# Altium PCB PCB1.PcbDoc (part 1 of 3)
Units mil, origin at the board's own origin, x right, y up, seen from the top; angles counter-clockwise.
Board outline 2860 x 1380 mil, 4 copper layers (L1, L2, L3, L4), stack 61.583 mil thick; 101 components, 94 nets, 397 pads, 115 vias.
Unrouted connection lines stored in the file: 102.
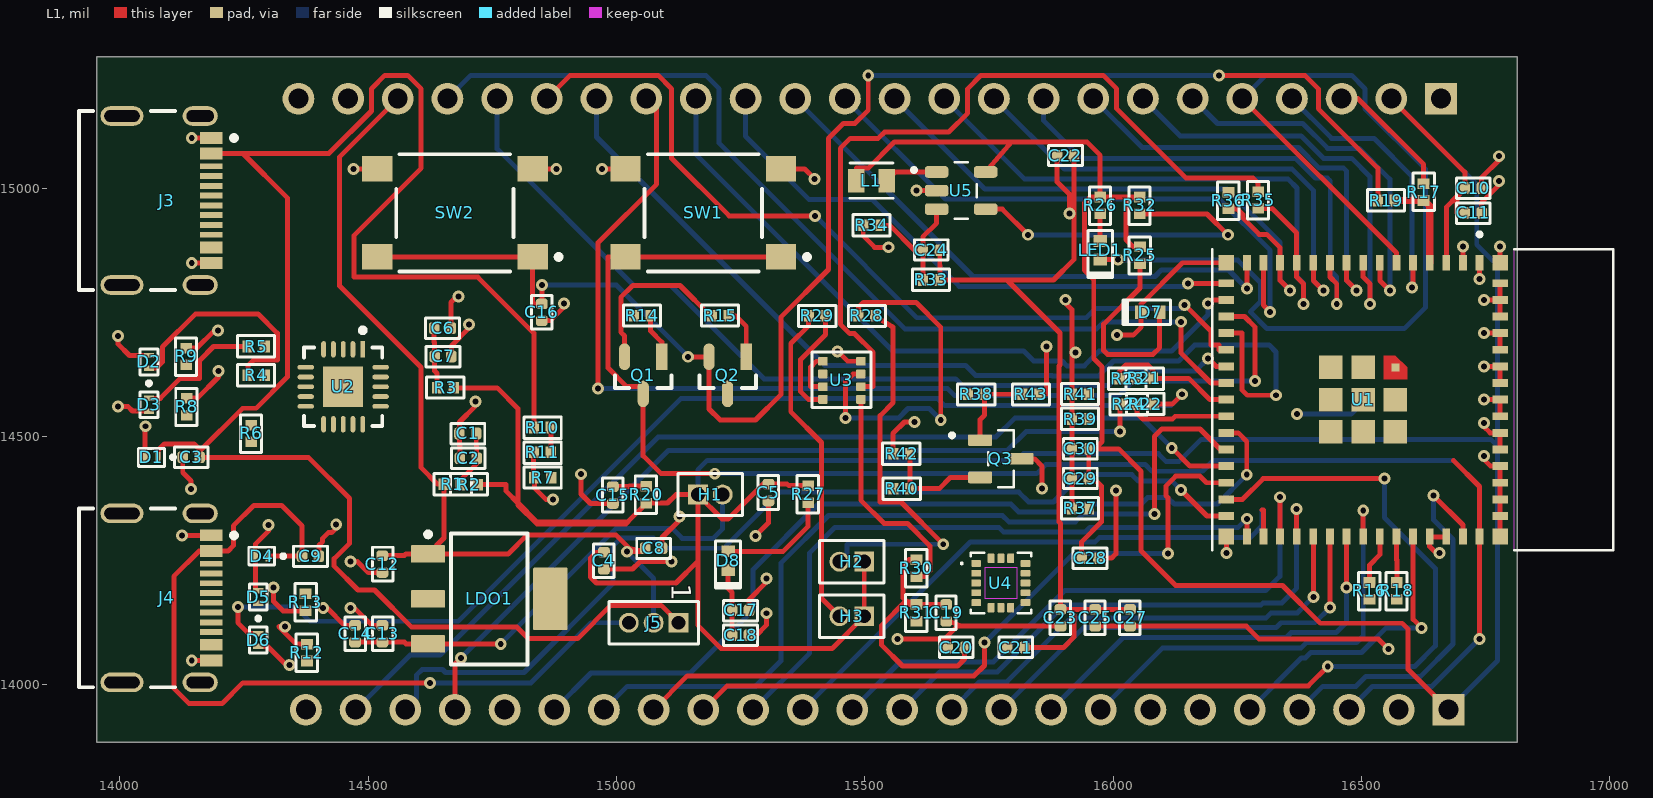
[diagram p0: L1 view]
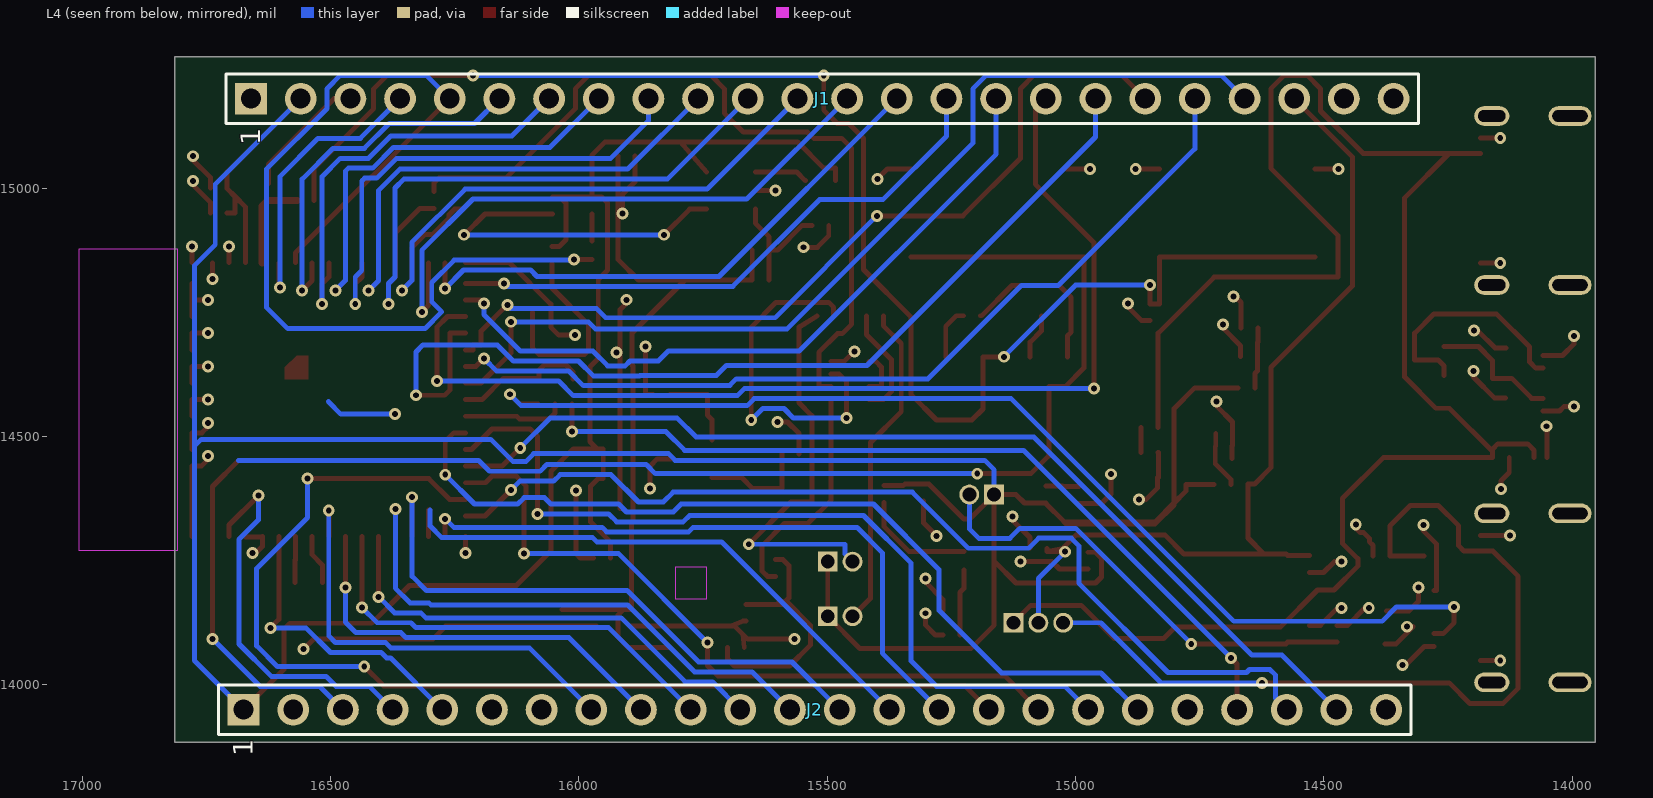
[diagram p1: L4 view, seen from below]
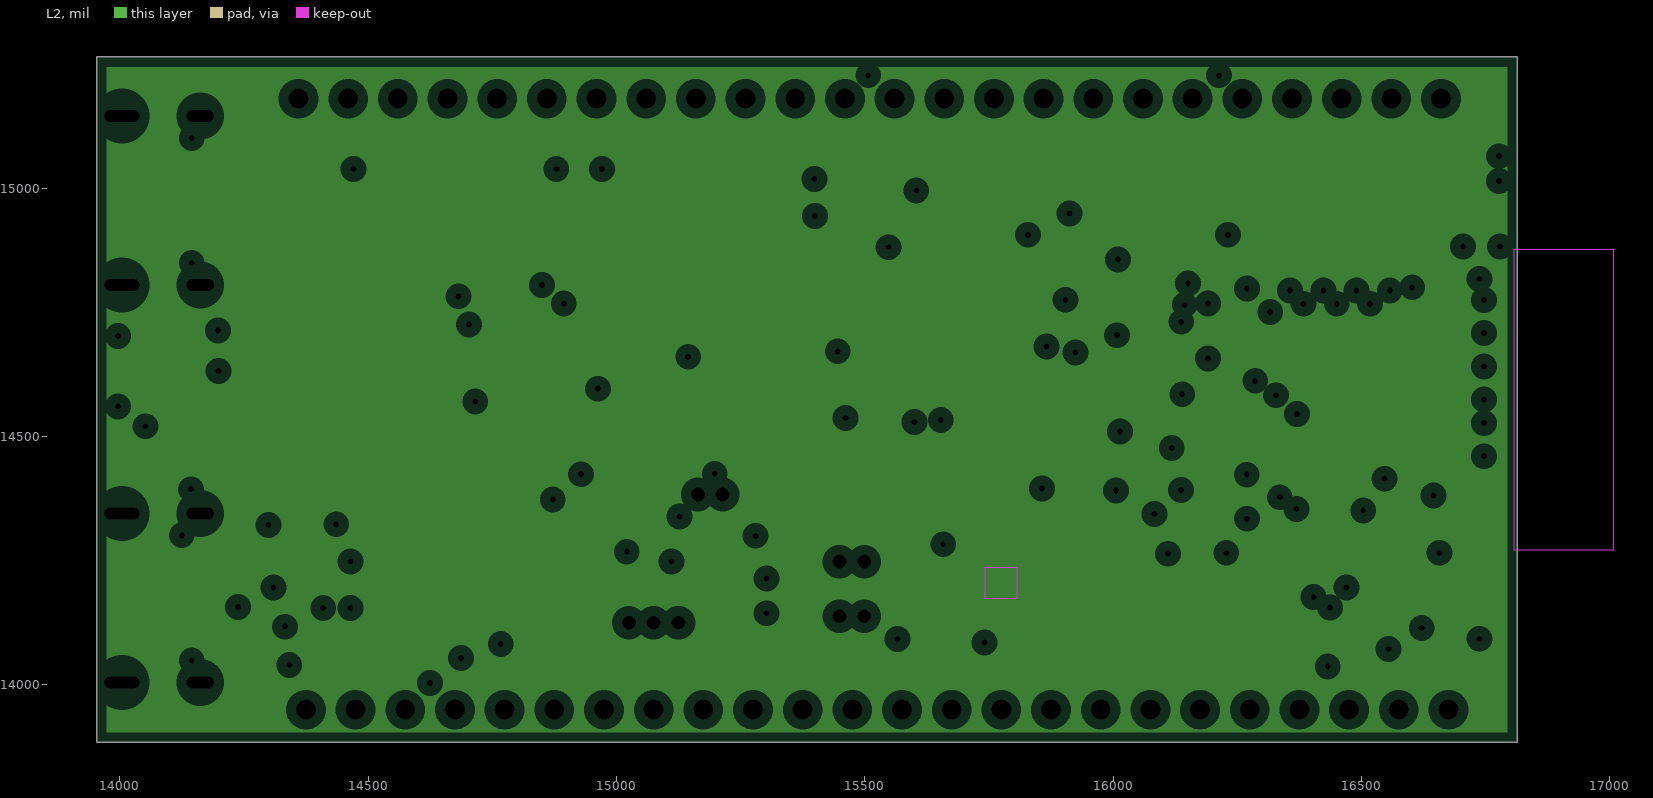
[diagram p2: L2, clearances drawn from the general rule]
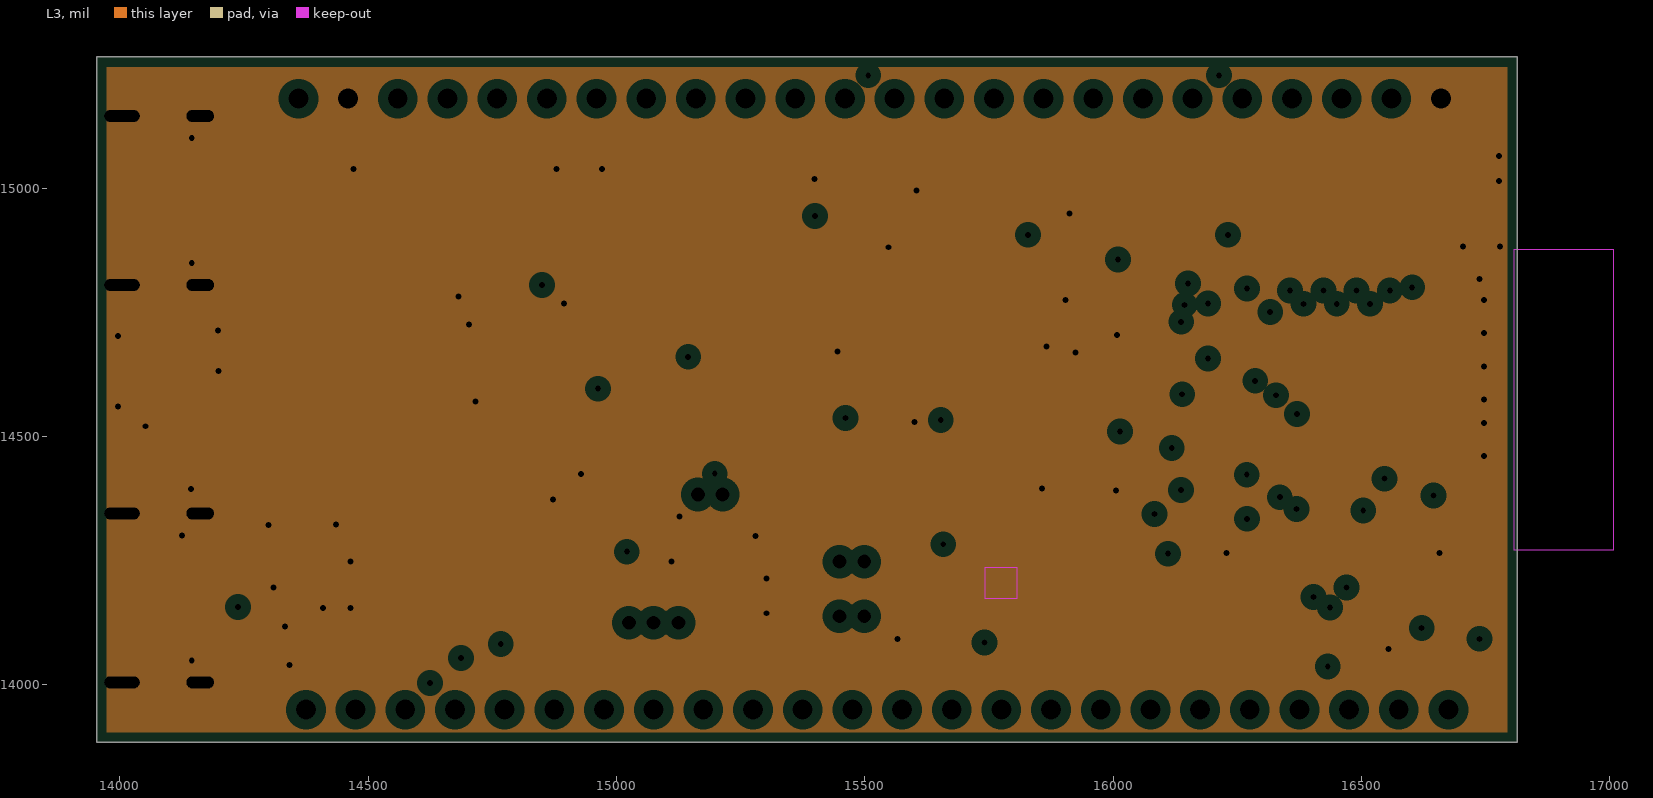
[diagram p3: L3, clearances drawn from the general rule]
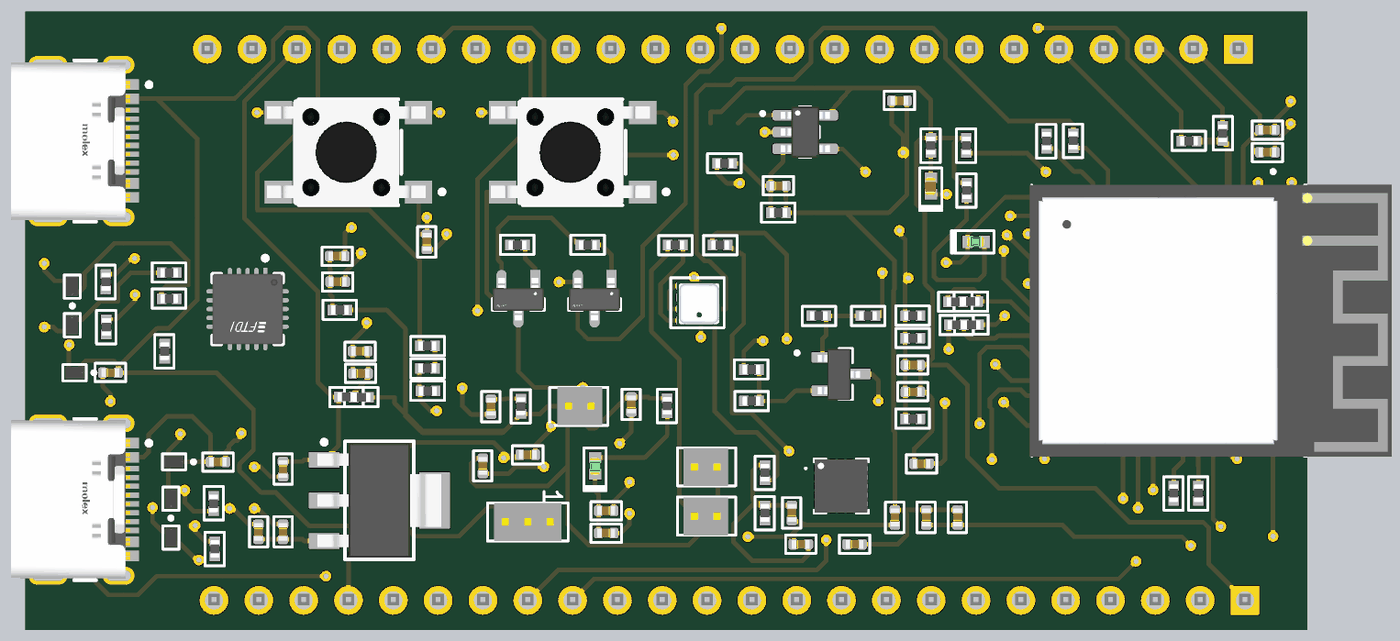
[diagram p5: 3D render of the assembled board from above, using the file's embedded part models]

## Layer stack, top to bottom
Top Solder: solder mask 0.4, Solder Resist, Dk 3.5
L1: signal copper 1.378
Dielectric 2: prepreg 3.9134, PP-006, Dk 4.1
L2: plane copper 0.5984
Dielectric 1: dielectric 49.8031, FR-4, Dk 4.8
L3: plane copper 0.5984, net GND
Dielectric 3: prepreg 3.9134, PP-006, Dk 4.1
L4: signal copper 1.378
Bottom Solder: solder mask 0.4, Solder Resist, Dk 3.5

## Board outline
13954,13884 13955,13884 16814,13884 16814,15264 13954,15264

## Design rules (kind name [scope] priority, off if disabled: settings)
Clearance [All] p1: gap=10 ignorepadtopadclearanceinfootprint=FALSE except(6: SMDPad-SMDPad)
ComponentClearance R1R2 [InComponent('R1') vs InComponent('R2')] p1: gap=0 collisioncheckmode=3 verticalgap=10 showdistances=FALSE
ComponentClearance R22R24 [InComponent('R22') vs InComponent('R24')] p2: gap=0 collisioncheckmode=3 verticalgap=10 showdistances=FALSE
ComponentClearance R23R21 [InComponent('R23') vs InComponent('R21')] p3: gap=0 collisioncheckmode=3 verticalgap=10 showdistances=FALSE
ComponentClearance [All] p4: gap=10 collisioncheckmode=3 verticalgap=10 showdistances=FALSE
PlaneClearance [All] p1: clearance=20
PlaneConnect [All] p1: planeconnectstyle=Direct reliefexpansion=20 reliefentries=4 reliefconductorwidth=10 reliefairgap=10
PolygonConnect [All] p1: connectstyle=Relief reliefconductorwidth=10 reliefentries=4 polygonreliefangle="90 Angle" airgapwidth=10
RoutingVias [All] p1: holewidth=12 width=24 viastyle="Through Hole" minholewidth=12 minwidth=24 maxholewidth=12 maxwidth=24
SolderMaskExpansion [All] p1: expansion=2 istentingtop=FALSE
SupplyNets "Schematic Supply Nets_6" [InNet('+3V3')] p1: voltage=0.000
SupplyNets "Schematic Supply Nets_5" [InNet('+5V')] p2: voltage=0.000
SupplyNets "Schematic Supply Nets_4" [InNet('+5V VBUS1')] p3: voltage=0.000
SupplyNets "Schematic Supply Nets_3" [InNet('+3V3-REG')] p4: voltage=0.000
SupplyNets "Schematic Supply Nets_2" [InNet('12V')] p5: voltage=0.000
SupplyNets "Schematic Supply Nets_1" [InNet('GND')] p6: voltage=0.000
SupplyNets "Schematic Supply Nets" [InNet('+5V VBUS2')] p7: voltage=0.000
Width [All] p1: maxlimit=100 minlimit=10 preferedwidth=10 bottomlayer_maxwidth=10 minimp=50.000000 maximp=50.000000 favimp=50.000000
27 further rules are at their usual default settings.

## Components (designator, comment, footprint, x,y, rotation, side; value= is the part's Value field where it differs from the comment)
C1 "4.7UF,16V" CAPC1005X55N 14701,14506 r180 top value=4.7uF
C2 "100nF,50V" CAPC1005X55N 14702,14456 r0 top value=100nF
C3 "100nF,50V" CAPC1005X55N 14144,14458 r0 top value=100nF
C4 "100nF,50V" CAPC1005X55N 14975,14250 r90 top value=100nF
C5 "100nF,50V" CAPC1005X55N 15306.07,14387.07 r90 top value=100nF
C6 "100nF,50V" CAPC1005X55N 14650,14718 r180 top value=100nF
C7 "100nF,50V" CAPC1005X55N 14651,14661 r180 top value=100nF
C8 "100nF,50V" CAPC1005X55N 15075,14275 r180 top value=100nF
C9 "100nF,50V" CAPC1005X55N 14384,14259 r180 top value=100nF
C10 "100nF,50V" CAPC1005X55N 16725,15000 r180 top value=100nF
C11 "10uf,10V" CAPC1005X55N 16725,14950 r180 top value=10uF
C12 "4.7UF,16V" CAPC1005X55N 14529,14243 r270 top value=4.7uF
C13 "10uf,10V" CAPC1005X55N 14529,14103 r270 top value=10uF
C14 "10uf,10V" CAPC1005X55N 14474,14103 r270 top value=10uF
C15 "1uf,35 V" CAPC1005X55N 14993,14382 r90 top value=1uF
C16 "100nF,50V" CAPC1005X55N 14850,14750 r90 top value=100nF
C17 "100nF,50V" CAPC1005X55N 15250,14150 r180 top value=100nF
C18 "100nF,50V" CAPC1005X55N 15250,14100 r180 top value=100nF
C19 "100nF,50V" CAPC1005X55N 15664,14145.01 r90 top value=100nF
C20 "10uf,10V" CAPC1005X55N 15684,14075.01 r0 top value=10uF
C21 "100nF,50V" CAPC1005X55N 15804,14075.01 r0 top value=100nF
C22 "10uf,10V" CAPC1005X55N 15904,15065.01 r0 top value=10uF
C23 "47UF,16V" CAPC1005X55N 15894,14135.01 r90 top value=47uF
C24 "470 pF ,50V" CAPC1005X55N 15634,14875.01 r0 top
C25 "4.7 uF, 25V" CAPC1005X55N 15964,14135.01 r90 top
C27 "10nF,50V" CAPC1005X55N 16034,14135.01 r90 top value=10nF
C28 "10uf,10V" CAPC1005X55N 15953.49,14255.01 r180 top value=10uF
C29 "4.7UF,16V" CAPC1005X55N 15934,14415.01 r0 top value=4.7uF
C30 "100nF,50V" CAPC1005X55N 15934,14475.01 r0 top value=100nF
D1 "AQ3045-01ETG" DIODFN100X60X50-2N 14064,14458 r180 top
D2 "AQ3045-01ETG" DIODFN100X60X50-2N 14059,14650.2 r90 top
D3 "AQ3045-01ETG" DIODFN100X60X50-2N 14059,14564 r270 top
D4 "AQ3045-01ETG" DIODFN100X60X50-2N 14286,14259 r180 top
D5 "AQ3045-01ETG" DIODFN100X60X50-2N 14279,14176.8 r90 top
D6 "AQ3045-01ETG" DIODFN100X60X50-2N 14279,14090.2 r270 top
D7 "LED-GREEN" LED0402_G 16075,14750 r0 top
D8 "LED-GREEN" LED0402_G 15225,14250 r90 top
H1 "2PIN HEADER" HDR_1X2-1.27MM 15164,14383 r90 top locked
H2 "2PIN HEADER" HDR_1X2-1.27MM 15499,14248 r270 top
H3 "2PIN HEADER" HDR_1X2-1.27MM 15499,14138 r270 top
J1 "24 PIN HEADER" hdr_1x24 16660,15180 r90 bottom locked
J2 "24 PIN HEADER" hdr_1x24 16675,13950 r90 bottom
J3 "217179-0001" FP-2171790001-MFG 14050,14975 r270 top locked
J4 "217179-0001" FP-2171790001-MFG 14050,14175 r270 top
J5 "HEADER" HDR_1X3_1.27mm 15125,14125 r270 top
L1 "10uH INDUCTOR" WE-LQS_2010 65513.49,65015.01 r0 top value=10uH
LDO1 "TL1963A-33DCYR" DCY0004A_N 14744,14173 r0 top locked
LED1 "LED RED" LED0402_R 15974,14875.01 r90 top
Q1 "BJT" FP-SS8050-G-IPC_B 15054,14623 r270 top
Q2 "BJT" FP-SS8050-G-IPC_B 15224,14623 r270 top
Q3 "2N7002" SOT95P240X111-3N 15774,14455.01 r0 top
R1 "0R" RESC1005X37N 14670,14404 r180 top value=0mR
R2 "0R" RESC1005X37N 14703.99,14403 r0 top value=0mR
R3 "0R" RESC1005X37N 14656.01,14598 r0 top value=0mR
R4 "27R" RESC1005X37N 14275,14623 r0 top
R5 "27R" RESC1005X37N 14275,14681 r0 top
R6 "0R" RESC1005X37N 14265,14506 r90 top value=0mR
R7 "10K" RESC1005X37N 14852,14417 r0 top value=10kR
R8 "5.1K" RESC1005X37N 14135,14560 r90 top value=5.1kR
R9 "5.1K" RESC1005X37N 14134,14660.99 r90 top value=5.1kR
R10 "4.7K" RESC1005X37N 14851,14518 r180 top value=4.7kR
R11 "10K" RESC1005X37N 14851,14468 r180 top value=10kR
R12 "5.1K" RESC1005X37N 14377,14065 r90 top value=5.1kR
R13 "5.1K" RESC1005X37N 14374,14166 r270 top value=5.1kR
R14 "10K" RESC1005X37N 15051.99,14743 r0 top value=10kR
R15 "10K" RESC1005X37N 15209,14743 r0 top value=10kR
R16 "0R" RESC1005X37N 16516,14189 r90 top value=0mR
R17 "27R" RESC1005X37N 16625,14992.01 r270 top
R18 "0R" RESC1005X37N 16571,14189 r90 top value=0mR
R19 "27R" RESC1005X37N 16550,14975 r0 top
R20 "10K" RESC1005X37N 15060,14383 r90 top value=10kR
R21 "0R" RESC1005X37N 16063,14617 r180 top value=0mR
R22 "0R" RESC1005X37N 16064.99,14565 r0 top value=0mR
R23 "0R" RESC1005X37N 16029.01,14616 r0 top value=0mR
R24 "0R" RESC1005X37N 16031.01,14565 r180 top value=0mR
R25 "1K" RESC1005X37N 16054,14865.01 r90 top value=1kR
R26 "1K" RESC1005X37N 15974,14965.01 r90 top value=1kR
R27 "1K" RESC1005X37N 15386.07,14384 r90 top value=1kR
R28 "1K" RESC1005X37N 15504,14743 r180 top value=1kR
R29 "4.7K" RESC1005X37N 15404,14743 r180 top value=4.7kR
R30 "10K" RESC1005X37N 15604,14235.01 r90 top value=10kR
R31 "10K" RESC1005X37N 15604,14145.01 r90 top value=10kR
R32 "1M Ohm" RESC1005X37N 16053.49,14965.01 r90 top value=1MR
R33 "47K" RESC1005X37N 15634,14815.01 r0 top value=47kR
R34 "5.62 K" RESC1005X37N 15514,14925.01 r0 top value=5.62kR
R35 "0R" RESC1005X37N 16292,14976 r90 top value=0mR
R36 "0R" RESC1005X37N 16232,14975 r90 top value=0mR
R37 "47K" RESC1005X37N 15934,14355.01 r0 top value=47kR
R38 "82R" RESC1005X37N 15724,14585.01 r180 top
R39 "82R" RESC1005X37N 15934,14535.01 r0 top
R40 "100R" RESC1005X37N 15574,14395.01 r180 top
R41 "22K" RESC1005X37N 15934,14585.01 r0 top value=22kR
R42 "100K" RESC1005X37N 15574,14465.01 r0 top value=100kR
R43 "51R" RESC1005X37N 15834,14585.01 r180 top
SW1 "PTS645SH50SMTR92 LFS" FP-PTS645SH50SMTR92LFS-MFG 15175,14950 r180 top
SW2 "PTS645SH50SMTR92 LFS" FP-PTS645SH50SMTR92LFS-MFG 14675,14950 r180 top
U1 "ESP-32-S3_MINI" XCVR_ESP32-S3-MINI-1-N8 16503.41,14574.14 r270 top locked
U2 "FT231XQ-R" FP-QFN-20-IPC_B 14450,14600 r270 top
U3 "BME280" PSON65P250X250X100-8N 15454,14613 r0 top
U4 "PAS SENSOR" PQFN50P300X300X80-16N 15774,14205.01 r0 top
U5 "2.7-12V Voltage B-regulator" SOT95P280X145-5N 15694,14995.01 r0 top

## Footprints (in the part's own frame and the unit in brackets; to place one, negate y for a bottom-side part, rotate by r counter-clockwise, add the part's x,y. Pads: shape width x height; smd on the part's side, far side on the other; paste and mask are expansions set on the pad)
CAPC1005X55N [mm]
  rrect53% 0.54x0.6 smd: 1(-0.43,0) 2(0.43,0)
  silkscreen extent -0.86,-0.51 0.86,0.53, body extent -0.5,-0.25 0.5,0.25, height 0.55
DCY0004A_N [mm] "SOT223, 4-Leads, Body 6.7x3.7mm, Pitch 2.3mm, IPC Medium Density"
  rrect11% 1.75x0.9 smd: 1(-3.125,2.3) 2(-3.125,0) 3(-3.125,-2.3)
  rrect6% 1.75x3.2 smd: 4(3.125,0)
  silkscreen extent -3.25,-3.35 1.95,3.42, body extent -3.5,-3.25 3.5,3.25, height 1.62
DIODFN100X60X50-2N [mm]
  rect 0.28x0.52 smd: 1(-0.325,0) 2(0.325,0)
  silkscreen extent -1.2,-0.46 0.66,0.46, body extent -0.55,-0.33 0.55,0.33, height 0.57
FP-2171790001-MFG [mm]
  rect 0.6x1.15 smd paste+0 mask+0: A1B12(-3.2,3.425) A4B9(-2.4,3.425) B1A12(3.2,3.425) B4A9(2.4,3.425)
  rect 0.3x1.15 smd paste+0 mask+0: A5(-1.25,3.425) A6(-0.25,3.425) A7(0.25,3.425) A8(1.25,3.425) B5(1.75,3.425) B6(0.75,3.425) B7(-0.75,3.425) B8(-1.75,3.425)
  rrect100% 1x1.8 hole 1.4 slot 0.6 at 0 deg paste-2539.97 mask+0: S1(-4.32,2.85) S2(4.32,2.85)
  rrect100% 1x2.2 hole 1.8 slot 0.6 at 0 deg paste-2539.97 mask+0: S3(-4.32,-1.15) S4(4.32,-1.15)
  silkscreen extent -4.57,-3.35 4.57,4.7, body extent -4.92,-3.45 4.92,4.1, height 0.25
FP-PTS645SH50SMTR92LFS-MFG [mm]
  rect 1.55x1.3 smd paste+0 mask+0: 1(-3.975,2.25) 2(3.975,2.25) 3(-3.975,-2.25) 4(3.975,-2.25)
  silkscreen extent -5.43,-3 3,3, body extent -4.37,-3 4.63,3, height 4.3
FP-QFN-20-IPC_B [mm]
  rect 0.84x0.242 smd paste+0 mask+0: 1(-1.916,1)
  rrect100% 0.84x0.242 smd paste+0 mask+0: 2(-1.916,0.5) 3(-1.916,0) 4(-1.916,-0.5) 5(-1.916,-1) 11(1.916,-1) 12(1.916,-0.5) 13(1.916,0) 14(1.916,0.5) 15(1.916,1)
  rrect100% 0.242x0.84 smd paste+0 mask+0: 6(-1,-1.916) 7(-0.5,-1.916) 8(0,-1.916) 9(0.5,-1.916) 10(1,-1.916) 16(1,1.916) 17(0.5,1.916) 18(0,1.916) 19(-0.5,1.916) 20(-1,1.916)
  rect 2.05x2.05 smd paste-1000 mask+0: 21(0,0)
  silkscreen extent -3.01,-2 2,2, body extent -2.59,-2.59 2.59,2.59, height 0.25
FP-SS8050-G-IPC_B [mm]
  rect 1.357x0.572 smd paste+0 mask+0: 1(-0.951,0.95)
  rrect100% 1.357x0.572 smd paste+0 mask+0: 2(-0.951,-0.95) 3(0.951,0)
  silkscreen extent 0,-1.45 0.65,1.45, body extent -1.85,-1.7 1.91,1.7, height 0.25
HDR_1X2-1.27MM [mil]
  rect 40x40 hole 28: 1(0,0)
  round 40 hole 28: 2(0,-50)
  silkscreen extent -42,-90 43,40, body extent -42,-77 43,23, height 154
HDR_1X3_1.27mm [mil]
  rect 40x40 hole 28: 1(0,0)
  round 40 hole 28: 2(0,-50) 3(0,-100)
  silkscreen extent -43,-140 43,40, body extent -43,-125 43,25, height 154
hdr_1x24 [mil]
  rect 64x64 / inner rect 100x64 / far side rect 64x64 hole 40: 1(0,0)
  round 64 / inner oval 100x64 / far side round 64 hole 40: 2(0,-100) 3(0,-200) 4(0,-300) 5(0,-400) 6(0,-500) 7(0,-600) 8(0,-700) 9(0,-800) 10(0,-900) 11(0,-1000) 12(0,-1100) 13(0,-1200) 14(0,-1300) 15(0,-1400) 16(0,-1500) 17(0,-1600) 18(0,-1700) 19(0,-1800) 20(0,-1900) 21(0,-2000) 22(0,-2100) 23(0,-2200) 24(0,-2300)
  silkscreen extent -50,-2350 50,50, body extent -47,-2350 51,50, height 385
LED0402_G [mm]
  rect 0.6x0.7 smd: 1(-0.475,0) 2(0.475,0)
  silkscreen extent -1.4,-0.64 1.02,0.64, body extent -0.53,-0.3 0.47,0.3, height 0.21
LED0402_R [mm]
  rect 0.6x0.7 smd: 1(-0.475,0) 2(0.475,0)
  silkscreen extent -1.4,-0.64 1.02,0.64, body extent -0.53,-0.27 0.47,0.33, height 0.2
PQFN50P300X300X80-16N [mm]
  rrect25% 0.49x0.35 smd: 1(-1.26,1) 2(-1.26,0.5) 3(-1.26,0) 4(-1.26,-0.5) 5(-1.26,-1) 9(1.26,-1) 10(1.26,-0.5) 11(1.26,0) 12(1.26,0.5) 13(1.26,1)
  rrect25% 0.35x0.49 smd: 6(-0.5,-1.26) 7(0,-1.26) 8(0.5,-1.26) 14(0.5,1.26) 15(0,1.26) 16(-0.5,1.26)
  Keep-Out Layer region: 0.8,-0.8 -0.8,-0.8 -0.8,0.8 0.8,0.8
  Keep-Out Layer region: 0.8,-0.8 -0.8,-0.8 -0.8,0.8 0.8,0.8
  silkscreen extent -2.05,-1.55 1.55,1.55, body extent -1.5,-1.5 1.5,1.5, height 0.8
PSON65P250X250X100-8N [mm]
  rrect25% 0.49x0.45 smd: 1(0.97,0.975) 2(0.97,0.325) 3(0.97,-0.325) 4(0.97,-0.975) 5(-0.97,-0.975) 6(-0.97,-0.325) 7(-0.97,0.325) 8(-0.97,0.975)
  silkscreen extent -1.52,-1.4 1.5,1.45, body extent -1.17,-1.28 1.33,1.22, height 1.01
RESC1005X37N [mm]
  rect 0.54x0.6 smd: 1(-0.432,0) 2(0.432,0)
  silkscreen extent -0.97,-0.53 0.94,0.56, body extent -0.5,-0.25 0.5,0.25, height 0.37
SOT95P240X111-3N [mm]
  rrect25% 1.23x0.6 smd: 1(-1.06,0.95) 2(-1.06,-0.95) 3(1.06,0)
  silkscreen extent -2.6,-1.46 0.65,1.46, body extent -1.33,-1.48 1.07,1.42, height 1.06
SOT95P280X145-5N [mm]
  rrect50% 1.21x0.59 smd: 1(-1.255,0.95) 2(-1.255,0) 3(-1.255,-0.95) 4(1.255,-0.95) 5(1.255,0.95)
  silkscreen extent -2.51,-1.45 0.8,1.45, body extent -1.4,-1.45 1.4,1.45, height 1.45
WE-LQS_2010 [mm] "SMD Power Inductor, 2-Leads, body 2x1.6mm"
  rect 0.85x1.2 smd: 1(-1270.775,-1270) 2(-1269.225,-1270)
  silkscreen extent -1271.1,-1270.9 -1268.9,-1269.1, body extent -1271,-1270.8 -1269,-1269.18, height 1.01
XCVR_ESP32-S3-MINI-1-N8 [mm]
  rect 0.8x0.4 smd: 1(-7,5.95) 2(-7,5.1) 3(-7,4.25) 4(-7,3.4) 5(-7,2.55) 6(-7,1.7) 7(-7,0.85) 8(-7,0) 9(-7,-0.85) 10(-7,-1.7) 11(-7,-2.55) 12(-7,-3.4) 13(-7,-4.25) 14(-7,-5.1) 15(-7,-5.95) 31(7,-5.95) 32(7,-5.1) 33(7,-4.25) 34(7,-3.4) 35(7,-2.55) 36(7,-1.7) 37(7,-0.85) 38(7,0) 39(7,0.85) 40(7,1.7) 41(7,2.55) 42(7,3.4) 43(7,4.25) 44(7,5.1) 45(7,5.95)
  rect 0.4x0.8 smd: 16(-5.95,-7) 17(-5.1,-7) 18(-4.25,-7) 19(-3.4,-7) 20(-2.55,-7) 21(-1.7,-7) 22(-0.85,-7) 23(0,-7) 24(0.85,-7) 25(1.7,-7) 26(2.55,-7) 27(3.4,-7) 28(4.25,-7) 29(5.1,-7) 30(5.95,-7) 46(5.95,7) 47(5.1,7) 48(4.25,7) 49(3.4,7) 50(2.55,7) 51(1.7,7) 52(0.85,7) 53(0,7) 54(-0.85,7) 55(-1.7,7) 56(-2.55,7) 57(-3.4,7) 58(-4.25,7) 59(-5.1,7) 60(-5.95,7)
  rect 1.2x1.2 smd: 61(0,0) 61_2(0,1.65) 61_3(1.65,1.65) 61_4(1.65,0) 61_5(1.65,-1.65) 61_6(0,-1.65) 61_7(-1.65,-1.65) 61_8(-1.65,0)
  rect 0.4x0.4 smd paste-1 mask+0: 61_1(-1.65,1.65)
  rect 0.8x0.8 smd: 62(-7,7) 63(-7,-7) 64(7,-7) 65(7,7)
  L1 region: -1.05,1.05 -2.25,1.05 -2.25,1.65 -1.65,2.25 -1.05,2.25
  Keep-Out Layer region: 7.7,7.725 -7.7,7.725 -7.7,12.775 7.7,12.775
  Keep-Out Layer region: 7.7,7.725 -7.7,7.725 -7.7,12.775 7.7,12.775
  silkscreen extent -8.55,-7.72 7.7,12.77, body extent -7.7,-7.84 7.7,12.66, height 2.56

## Part data
C1 C12 C29: library part CL05A475KQ5NRNC, "CAP CER 4.7UF 6.3V X5R 0402", Case Code (Imperial)=0402, Case Code (Metric)=1005, Dielectric=X5R, LCSC PART Number=C2932473, Manufacturer=Samsung, Max Operating Temperature=85°C, Min Operating Temperature=-55°C, Package Quantity=1, Tolerance=10%, Voltage Rating=6.3V, Case/Package=0402, Category="Ceramic Capacitors", ComponentLink1Description=https://datasheet.ciiva.com/25793/cl05a475kq5nrnc-25793634.pdf?src-supplier=Digikey, ComponentLink1URL=https://datasheet.ciiva.com/25793/cl05a475kq5nrnc-25793634.pdf?src-supplier=Digikey, ComponentLink2Description=https://datasheet.ciiva.com/26838/getdatasheetpartid-353228-26838196.pdf?src-supplier=Verical, ComponentLink2URL=https://datasheet.ciiva.com/26838/getdatasheetpartid-353228-26838196.pdf?src-supplier=Verical, Construction=Flat, Depth=0.5mm, Height=0.5mm, Lead Free="Lead Free", Length=1mm, Manufacturer Part Number=CL05A475KQ5NRNC, Material=Ceramic, Mounting Technology="Surface Mount", Packaging="Tape and Reel", Pricing="1=0.00646 (USD)", Radiation Hardening=No, RoHS=Yes, RoHS Compliant=Yes, Series=CL, Stock=1403600, Supplier=Avnet, Supplier Part Number=CL05A475KQ5NRNC, Thickness=0.022inch, Width=0.02inch
C2 C3 C4 C5 C6 C7 C8 C9 C10 C16 C17 C18 C19 C21 C30: library part CL05B104KB54PNC, "CL05B104KB54PNC", LCSC PART Number=C307331, Manufacturer=Samsung, Max Operating Temperature=125°C, Min Operating Temperature=-55°C, Tolerance=10%, Voltage Rating=50V, Category="Ceramic Capacitors", ComponentLink1Description=https://datasheet.octopart.com/CL05B104KB54PNC-Samsung-datasheet-8326407.pdf?src-supplier=TME, ComponentLink1URL=https://datasheet.octopart.com/CL05B104KB54PNC-Samsung-datasheet-8326407.pdf?src-supplier=TME, Height=550um, Manufacturer Part Number=CL05B104KB54PNC, Material=4241ConductorMaterial, Pricing="10000=0.00428, 20000=0.00423, 40000=0.00747, 60000=0.00411, 80000=0.00406 (USD)", RoHS=Yes, RoHS Compliant=Yes, Supplier=Avnet, Supplier Part Number=CL05B104KB54PNC
C11 C13 C14 C20 C22 C28: library part CL05A106MP5NRNC, "CL05A106MP5NRNC", Case/Package=0402, LCSC PART Number=C315248, Manufacturer=Samsung, Max Operating Temperature=85°C, Min Operating Temperature=-55°C, Tolerance=20%, Voltage Rating=10V, Category="Ceramic Capacitors", Height=550um, Manufacturer Part Number=CL05A106MP5NRNC, Material=Ceramic, Pricing="100000=0.0442, 120000=0.04397, 220000=0.04375, 500000=0.04352, 1000000=0.0433 (USD)", RoHS=Yes, RoHS Compliant=Yes, Supplier=Avnet, Supplier Part Number=CL05A106MP5NRNC
C15: library part CL05A105KL5NRNC, "CL05A105KL5NRNC", Case Code (Imperial)=0402, Case Code (Metric)=1005, LCSC PART Number=C307413, Manufacturer=Samsung, Max Operating Temperature=85°C, Min Operating Temperature=-55°C, Supplier Part Number=1276-6796-1-ND, Tolerance=10%, Voltage Rating=35V, Case/Package=0402, Category="Ceramic Capacitors", ComponentLink1Description=http://www.samsungsem.com/kr/support/product-search/mlcc/CL05A105KL5NRNC.jsp?src-supplier=Digikey, ComponentLink1URL=http://www.samsungsem.com/kr/support/product-search/mlcc/CL05A105KL5NRNC.jsp?src-supplier=Digikey, ComponentLink2Description=https://datasheet.octopart.com/CL05A105KL5NRNC-Samsung-datasheet-8326407.pdf?src-supplier=TME, ComponentLink2URL=https://datasheet.octopart.com/CL05A105KL5NRNC-Samsung-datasheet-8326407.pdf?src-supplier=TME, Height=550um, Length=0.039inch, Manufacturer Part Number=CL05A105KL5NRNC, Material=4241ConductorMaterial, Mounting Technology="Surface Mount", Packaging="Cut Tape", Pricing="1=0.27, 10=0.17, 100=0.1027, 1000=0.07807, 2500=0.06853, 5000=0.0679, 10000=0.05902, 20000=0.05548, 30000=0.05372, 50000=0.05194, 70000=0.04872, 100000=0.04608 (USD)", RoHS=Yes, RoHS Compliant=Yes, Series=CL, Stock=194971, Supplier=Digikey, Thickness=0.022inch, Width=0.02inch
C23: library part T499D476K016ATE800, "CAP TANT 47UF 10% 16V 2917", Case Code (Imperial)=2917, Case Code (Metric)=7343, Dielectric Material=Tantalum, ESR (Equivalent Series Resistance)=800mR, LCSC PART Number=C122336, Manufacturer=KEMET, Max Operating Temperature=175°C, Min Operating Temperature=-55°C, Package Quantity=1, Ratings=AEC-Q200, Supplier Part Number=80-T499D476K16TE800, Tolerance=10%, Voltage Rating=16V, Case/Package=2917, Category="Tantalum Capacitors", ComponentLink1Description=https://datasheet.ciiva.com/261/kem-t2054-t499-auto-261119.pdf?src-supplier=Digikey, ComponentLink1URL=https://datasheet.ciiva.com/261/kem-t2054-t499-auto-261119.pdf?src-supplier=Digikey, ComponentLink2Description=https://datasheet.ciiva.com/261/kem-t2054-t499-auto-261120.pdf?src-supplier=Digikey, ComponentLink2URL=https://datasheet.ciiva.com/261/kem-t2054-t499-auto-261120.pdf?src-supplier=Digikey, ComponentLink3Description=https://datasheet.ciiva.com/261/kem-t2054-t499-auto-261121.pdf?src-supplier=Digikey, ComponentLink3URL=https://datasheet.ciiva.com/261/kem-t2054-t499-auto-261121.pdf?src-supplier=Digikey, Construction=Flat, Depth=4.3mm, Dissipation Factor=6%, Features="General Purpose", Height=3.1mm, Height - Seated (Max)=0.11inch, Lead Free="Lead Free", Length=7.3mm, Manufacturer Part Number=T499D476K016ATE800, Mounting Technology="Surface Mount", Packaging="Tape and Reel", Pins=2, Polarity=Polar, Pricing="1=2.24, 10=1.43, 50=1.31, 100=1.31, 1000=1.12, 10000=0.758 (USD)", Radiation Hardening=No, Reach SVHC Compliant=No, RoHS=Yes, RoHS Compliant=Yes, Series=T499, Stock=4898, Supplier=Mouser, Termination=SMD/SMT, Voltage Rating (DC)=16V, Width=0.169inch
C24: library part CC0402FRNPO9BN471, "CAP CER 470PF 50V C0G/NPO 0402", LCSC PART Number=C513551, Manufacturer=Yageo, Supplier Part Number=5114427, Category="Ceramic Capacitors", ComponentLink1Description=https://datasheet.octopart.com/CC0402FRNPO9BN471-Yageo-datasheet-151948684.pdf?src-supplier=Farnell, ComponentLink1URL=https://datasheet.octopart.com/CC0402FRNPO9BN471-Yageo-datasheet-151948684.pdf?src-supplier=Farnell, ComponentLink2Description=https://datasheet.octopart.com/CC0402FRNPO9BN471-Yageo-datasheet-151948684.pdf?src-supplier=Newark, ComponentLink2URL=https://datasheet.octopart.com/CC0402FRNPO9BN471-Yageo-datasheet-151948684.pdf?src-supplier=Newark, ComponentLink3Description=https://datasheet.octopart.com/CC0402FRNPO9BN471-Yageo-datasheet-137875056.pdf?src-supplier=Future+Electronics, ComponentLink3URL=https://datasheet.octopart.com/CC0402FRNPO9BN471-Yageo-datasheet-137875056.pdf?src-supplier=Future+Electronics, Manufacturer Part Number=CC0402FRNPO9BN471, Pricing="10000=0.015, 20000=0.0148, 30000=0.0146, 50000=0.0145, 100000=0.0141 (USD)", RoHS=Yes, RoHS Compliant=Yes, Stock=10000, Supplier="Future Electronics"
C25: library part KGM05CR51E475MH, "Cap Cer 4.7UF 25V X5R 0402", LCSC PART Number=C20218024, Manufacturer="Kyocera AVX", Supplier Part Number=478-KGM05CR51E475MHCT-ND, Manufacturer Part Number=KGM05CR51E475MH, Pricing="1=0.26, 10=0.167, 100=0.1145, 1000=0.08368, 2500=0.07509, 5000=0.0696 (USD)", RoHS=No, Stock=57965, Supplier=Digikey
C27: library part C0402C103K5RECAUTO, "CAP CER 0402 10NF 50V X7R 10%", Case/Package=0402, Dielectric=X7R, LCSC PART Number=C1513170, Manufacturer=KEMET, Max Operating Temperature=125°C, Min Operating Temperature=-55°C, Ratings=AEC-Q200, Tolerance=10%, Voltage Rating=50V, Category="Ceramic Capacitors", ComponentLink1Description=https://datasheet.octopart.com/C0402C103K5RECAUTO-KEMET-datasheet-149521617.pdf?src-supplier=Farnell, ComponentLink1URL=https://datasheet.octopart.com/C0402C103K5RECAUTO-KEMET-datasheet-149521617.pdf?src-supplier=Farnell, ComponentLink2Description=https://api.kemet.com/component-edge/download/datasheet/C0402C103K5RECAUTO.pdf?src-supplier=Digikey, ComponentLink2URL=https://api.kemet.com/component-edge/download/datasheet/C0402C103K5RECAUTO.pdf?src-supplier=Digikey, ComponentLink3Description=https://datasheet.octopart.com/C0402C103K5RECAUTO-KEMET-datasheet-175422754.pdf?src-supplier=Newark, ComponentLink3URL=https://datasheet.octopart.com/C0402C103K5RECAUTO-KEMET-datasheet-175422754.pdf?src-supplier=Newark, ComponentLink4Description=http://www.farnell.com/datasheets/2723677.pdf?src-supplier=Newark, ComponentLink4URL=http://www.farnell.com/datasheets/2723677.pdf?src-supplier=Newark, ComponentLink5Description=http://www.farnell.com/datasheets/2723677.pdf?src-supplier=Element14, ComponentLink5URL=http://www.farnell.com/datasheets/2723677.pdf?src-supplier=Element14, ComponentLink6Description=https://datasheet.octopart.com/C0402C103K5RECAUTO-KEMET-datasheet-153706760.pdf?src-supplier=Electro+Sonic, ComponentLink6URL=https://datasheet.octopart.com/C0402C103K5RECAUTO-KEMET-datasheet-153706760.pdf?src-supplier=Electro+Sonic, Manufacturer Part Number=C0402C103K5RECAUTO, Mounting Technology="Surface Mount", Packaging="Tape and Reel", Pricing="1=0.078, 10=0.058, 25=0.054, 100=0.0297, 250=0.0294, 500=0.0291, 1000=0.0175 (USD)", RoHS=Yes, RoHS Compliant=Yes, Series="ESD SMD Auto X7R", Stock=2267, Supplier="Arrow Electronics", Supplier Part Number=C0402C103K5RECAUTO, Voltage Rating (DC)=50V
D1 D2 D3 D4 D5 D6: "TVS DIODE 5.3VWM 12VC SOD882", LCSC PART Number=C3710326, Leakage Current=100nA, Manufacturer=Littelfuse, Max Operating Temperature=150°C, Min Breakdown Voltage=6.8V, Min Operating Temperature=-55°C, Operating Supply Voltage=5.3V, Peak Pulse Current=3A, Peak Pulse Power=40W, Power Line Protection=No, Supplier Part Number=F9321CT-ND, Category="TVS Diodes", ComponentLink1Description=http://www.littelfuse.com/~/media/electronics/datasheets/tvs_diode_arrays/littelfuse_tvs_diode_array_aq3045_datasheet.pdf.pdf?src-supplier=Digikey, ComponentLink1URL=http://www.littelfuse.com/~/media/electronics/datasheets/tvs_diode_arrays/littelfuse_tvs_diode_array_aq3045_datasheet.pdf.pdf?src-supplier=Digikey, ComponentLink2Description=https://www.littelfuse.com/~/media/electronics/datasheets/tvs_diode_arrays/littelfuse_tvs_diode_array_aq3045_datasheet.pdf.pdf?src-supplier=Digikey, ComponentLink2URL=https://www.littelfuse.com/~/media/electronics/datasheets/tvs_diode_arrays/littelfuse_tvs_diode_array_aq3045_datasheet.pdf.pdf?src-supplier=Digikey, ComponentLink3Description=https://datasheet.octopart.com/AQ3045-01ETG-Littelfuse-datasheet-101609968.pdf?src-supplier=Farnell, ComponentLink3URL=https://datasheet.octopart.com/AQ3045-01ETG-Littelfuse-datasheet-101609968.pdf?src-supplier=Farnell, ComponentLink4Description=https://datasheet.octopart.com/AQ3045-01ETG-Littelfuse-datasheet-140480283.pdf?src-supplier=Future+Electronics, ComponentLink4URL=https://datasheet.octopart.com/AQ3045-01ETG-Littelfuse-datasheet-140480283.pdf?src-supplier=Future+Electronics, Diode Type=ZENER, Manufacturer Part Number=AQ3045-01ETG, Mounting Technology="Surface Mount", Number of Bidirectional Channels=1, Number of Channels=1, Packaging="Cut Tape", Pricing="1=0.46, 10=0.302, 100=0.141, 500=0.134, 1000=0.127, 2000=0.1255, 5000=0.124 (USD)", Reverse Standoff Voltage=5.3V, RoHS=Yes, RoHS Compliant=Yes, Series="Automotive, AEC-Q101, AQ3045, SPA®", Stock=12123, Supplier=Digikey
D7 D8: library part VLMG1500-GS08, "LED YLW-GRN 0402 SMD", Case Code (Imperial)=0402, Case Code (Metric)=1005, Color=Green,Yellow, Forward Current=30mA, Forward Voltage=2V, Illumination Color=Green, LCSC PART Number=C511404, Lens Color=Clear, Manufacturer=Vishay, Max Operating Temperature=85°C, Min Operating Temperature=-30°C, Package Quantity=1, Power Dissipation=75mW, Reverse Voltage=5V, Supplier Part Number=78-VLMG1500-GS08, Test Current=20mA, Case/Package=0402, Category=LEDs, ComponentLink1Description=https://datasheet.ciiva.com/13945/vlmo1500-13945360.pdf?src-supplier=Digikey, ComponentLink1URL=https://datasheet.ciiva.com/13945/vlmo1500-13945360.pdf?src-supplier=Digikey, ComponentLink2Description=https://datasheet.ciiva.com/12071/vlmo1500-244705-12071911.pdf?src-supplier=Mouser, ComponentLink2URL=https://datasheet.ciiva.com/12071/vlmo1500-244705-12071911.pdf?src-supplier=Mouser, ComponentLink3Description=https://datasheet.ciiva.com/13945/vlmo1500-13945358.pdf?src-supplier=Digikey, ComponentLink3URL=https://datasheet.ciiva.com/13945/vlmo1500-13945358.pdf?src-supplier=Digikey, ComponentLink4Description=https://datasheet.ciiva.com/13945/vlmo1500-13945359.pdf?src-supplier=Digikey, ComponentLink4URL=https://datasheet.ciiva.com/13945/vlmo1500-13945359.pdf?src-supplier=Digikey, ComponentLink5Description=https://datasheet.ciiva.com/30005/vlmo1500-30005134.pdf?src-supplier=Avnet, ComponentLink5URL=https://datasheet.ciiva.com/30005/vlmo1500-30005134.pdf?src-supplier=Avnet, Depth=0.5mm, Dominant Wavelength=571nm, Height=0.35mm, Lead Free="Lead Free", Length=1mm, Lens Style=Rectangular, Luminous Intensity=35mcd, Manufacturer Part Number=VLMG1500-GS08, Mounting Technology="Surface Mount", Number of Elements=1, Number of LEDs=1, Packaging="Tape and Reel", Pins=2, Power Rating=75mW, Pricing="1=0.33, 10=0.189, 50=0.189, 100=0.089, 1000=0.08, 10000=0.055 (USD)", Radiation Hardening=No, Reach SVHC Compliant=Unknown, RoHS=Yes, RoHS Compliant=Yes, Series=CHipLED, Stock=31007, Supplier=Mouser, Viewing Angle=130°, Wavelength=571nm, Width=0.5mm
H1 H2 H3: library part FTS-102-01-F-S, "CONN HEADER VERT 2POS 1.27MM", Flammability Rating="UL94 V-0", Insulation Color=Black, LCSC PART Number=C6045317, Manufacturer=Samtec, Max Operating Temperature=125°C, Min Operating Temperature=-55°C, Category=Connectors, ComponentLink1Description=http://suddendocs.samtec.com/catalog_english/fts.pdf?src-supplier=Digikey, ComponentLink1URL=http://suddendocs.samtec.com/catalog_english/fts.pdf?src-supplier=Digikey, ComponentLink2Description=http://www.samtec.com/documents/webfiles/pdf/FTS.pdf?src-supplier=Avnet, ComponentLink2URL=http://www.samtec.com/documents/webfiles/pdf/FTS.pdf?src-supplier=Avnet, ComponentLink3Description=https://datasheet.octopart.com/FTS-102-01-F-S-Samtec-datasheet-151470456.pdf?src-supplier=Sager+Electronics, ComponentLink3URL=https://datasheet.octopart.com/FTS-102-01-F-S-Samtec-datasheet-151470456.pdf?src-supplier=Sager+Electronics, ComponentLink4Description=https://datasheet.octopart.com/FTS-102-01-F-S-Samtec-datasheet-118493358.pdf?src-supplier=Electro+Sonic, ComponentLink4URL=https://datasheet.octopart.com/FTS-102-01-F-S-Samtec-datasheet-118493358.pdf?src-supplier=Electro+Sonic, ComponentLink5Description=https://datasheet.octopart.com/FTS-102-01-F-S-Samtec-datasheet-176663378.pdf?src-supplier=Toby+Electronics, ComponentLink5URL=https://datasheet.octopart.com/FTS-102-01-F-S-Samtec-datasheet-176663378.pdf?src-supplier=Toby+Electronics, Contact Finish - Mating=GOLD, Contact Material=Bronze, Contact Plating=Gold, Contact Shape=Square, Contact Type="Male Pin", Fastening Type=Pull, Gender=Male, Insulation Material=Polymer, Manufacturer Part Number=FTS-102-01-F-S, Mounting Technology="Through Hole", Number of Contacts=2, Number of Positions=2, Number of Rows=1, Packaging=Bulk, Pitch=1.27mm, Pricing="1=0.4802, 10=0.47775, 30=0.3492, 50=0.3474, 100=0.3456 (USD)", Radiation Hardening=No, RoHS=Yes, RoHS Compliant=Yes, Series=FTS, Stock=3208, Supplier=Avnet, Supplier Part Number=FTS-102-01-F-S, Termination=Solder
J1 J2: library part 22-28-4245, "CONN HEADER VERT 24POS 2.54MM", Current Rating=4A, Housing Color=Black, LCSC PART Number=C7145888, Manufacturer=Molex, Supplier Part Number=538-22-28-4245, Category="Headers and Wire Housings", ComponentLink1Description=https://datasheet.ciiva.com/6814/022284363-sd-6814049.pdf?src-supplier=Digikey, ComponentLink1URL=https://datasheet.ciiva.com/6814/022284363-sd-6814049.pdf?src-supplier=Digikey, ComponentLink2Description=https://datasheet.ciiva.com/10075/0022284245-pcb-headers-10075617.pdf?src-supplier=Avnet, ComponentLink2URL=https://datasheet.ciiva.com/10075/0022284245-pcb-headers-10075617.pdf?src-supplier=Avnet, ComponentLink3Description=https://datasheet.ciiva.com/1433/1597854-1433759.pdf?src-supplier=Element14, ComponentLink3URL=https://datasheet.ciiva.com/1433/1597854-1433759.pdf?src-supplier=Element14, Contact Material=Brass, Contact Plating=Gold, Gender=Male, Lead Free="Lead Free", Manufacturer Part Number=22-28-4245, Mounting Technology="Through Hole", Number of Circuits=24, Number of Contacts=24, Number of Positions=24, Number of Rows=1, Orientation=Vertical, Packaging=Bulk, Pitch=2.54mm, Plating=Tin, Pricing="1=1.21, 10=1.14, 50=1.14, 100=1.06, 1000=0.709, 10000=0.709 (USD)", RoHS=No, Stock=182, Supplier=Mouser, Termination=Solder
J3 J4: "CONN RCP USB2.0 TYP C 24P SMD RA", Current Rating=1.25A, LCSC PART Number=C3197684, Manufacturer=Molex, Max Operating Temperature=85°C, Min Operating Temperature=-40°C, Supplier Part Number=538-217179-0001, Voltage Rating=30V, Category=Connectors, Contact Material=Nickel,Gold, Gender=Receptacle, Height=3.36mm, Manufacturer Part Number=217179-0001, Number of Contacts=16, Pricing="1=0.79, 10=0.56, 50=0.56, 100=0.513, 1000=0.513, 1200=0.436, 2400=0.41, 4800=0.399, 10000=0.399, 24000=0.39 (USD)", RoHS=No, Stock=26428, Supplier=Mouser, USB Standard="USB 2.0"
J5: library part FTS-103-01-F-S, "CONN HEADER VERT 3POS 1.27MM", LCSC PART Number=C3333578, Manufacturer=Samtec, Supplier Part Number=612-FTS-103-01-F-S-ND, Category=Connectors, ComponentLink1Description=http://suddendocs.samtec.com/prints/fts-1xx-xx-xx-xx-xx-mkt.pdf?src-supplier=Digikey, ComponentLink1URL=http://suddendocs.samtec.com/prints/fts-1xx-xx-xx-xx-xx-mkt.pdf?src-supplier=Digikey, ComponentLink2Description=http://www.samtec.com/documents/webfiles/pdf/FTS.pdf?src-supplier=Avnet, ComponentLink2URL=http://www.samtec.com/documents/webfiles/pdf/FTS.pdf?src-supplier=Avnet, ComponentLink3Description=https://datasheet.octopart.com/FTS-103-01-F-S-Samtec-datasheet-176663378.pdf?src-supplier=Toby+Electronics, ComponentLink3URL=https://datasheet.octopart.com/FTS-103-01-F-S-Samtec-datasheet-176663378.pdf?src-supplier=Toby+Electronics, ComponentLink4Description=https://datasheet.octopart.com/FTS-103-01-F-S-Samtec-datasheet-151470456.pdf?src-supplier=Sager+Electronics, ComponentLink4URL=https://datasheet.octopart.com/FTS-103-01-F-S-Samtec-datasheet-151470456.pdf?src-supplier=Sager+Electronics, Contact Plating=Gold, Gender=Male, Manufacturer Part Number=FTS-103-01-F-S, Mounting Technology="Through Hole", Number of Contacts=3, Number of Rows=1, Packaging=Bulk, Pitch=1.27mm, Pricing="1=0.73, 50=0.6378, 100=0.5407, 500=0.4491, 1000=0.38362, 2000=0.31431, 5000=0.2478, 10000=0.228 (USD)", Radiation Hardening=No, RoHS=Yes, RoHS Compliant=Yes, Stock=1896, Supplier=Digikey, Termination=Solder
L1: library part 74404020100, "FIXED IND 10UH 500MA 850MOHM SMD", Case/Package=Nonstandard, Current Rating=500mA, DC Resistance (DCR)=850mR, Inductance Tolerance=20%, Manufacturer="Wurth Electronics", Max Operating Temperature=125°C, Min Operating Temperature=-40°C, Saturation Current=600mA, Self Resonant Frequency=39MHz, Supplier Part Number=732-10745-1-ND, Test Frequency=1MHz, Category="Fixed Inductors", ComponentLink1Description=http://www.farnell.com/datasheets/2277209.pdf?src-supplier=Farnell, ComponentLink1URL=http://www.farnell.com/datasheets/2277209.pdf?src-supplier=Farnell, ComponentLink2Description=http://www.farnell.com/datasheets/2277209.pdf?src-supplier=Element14, ComponentLink2URL=http://www.farnell.com/datasheets/2277209.pdf?src-supplier=Element14, ComponentLink3Description=https://katalog.we-online.de/pbs/datasheet/74404020100.pdf?src-supplier=Digikey, ComponentLink3URL=https://katalog.we-online.de/pbs/datasheet/74404020100.pdf?src-supplier=Digikey, ComponentLink4Description=http://www.farnell.com/datasheets/2277209.pdf?src-supplier=Newark, ComponentLink4URL=http://www.farnell.com/datasheets/2277209.pdf?src-supplier=Newark, Core Material=Ferrite, Height=1mm, Length=2mm, Manufacturer Part Number=74404020100, Mounting Technology="Surface Mount", Packaging="Cut Tape", Pricing="1=0.54, 50=0.451, 100=0.3429, 1000=0.2979 (USD)", RoHS=Yes, RoHS Compliant=Yes, Series=WE-LQS, Shielding=Shielded, Stock=3411, Supplier=Digikey, Tolerance=20%, Width=1.6mm, Würth Elektronik=73D1808
LDO1: "IC REG LIN 3.3V 1.5A SOT-223-4", Case/Package=SOT-223-4, Dropout Voltage=340mV, Input Bias Current=1mA, LCSC PART Number=C181262, Manufacturer="Texas Instruments", Max Operating Temperature=125°C, Max Output current=1.5A, Max Output Voltage=3.3V, Max Supply Voltage=20V, Min Input Voltage=2.1V, Min Operating Temperature=-40°C, Package Quantity=2500, Supplier Part Number=595-TL1963A-33DCYR, Accuracy=3%, Category="Voltage Regulators - Linear", ComponentLink1Description=https://datasheet.ciiva.com/2046/-2046068.pdf?src-supplier=Digikey, ComponentLink1URL=https://datasheet.ciiva.com/2046/-2046068.pdf?src-supplier=Digikey, Height=1.6mm, Lead Free="Lead Free", Length=6.5mm, Manufacturer Part Number=TL1963A-33DCYR, Min Output Voltage=3.3V, Number of Outputs=1, Operating Supply Current=1mA, Output Current=1.5A, Output Type=Fixed, Output Voltage=3.3V, Packaging="Cut Tape", Pins=4, Polarity=Positive, Pricing="1=2.77, 10=2.07, 50=1.9, 100=1.7, 1000=1.51, 10000=1.39 (USD)", Quiescent Current=1mA, RoHS=Yes, RoHS Compliant=Yes, Series=TL1963A-33, Stock=9346, Supplier=Mouser, Thickness=1.6mm, Weight=0.003951oz, Width=3.5mm
LED1: library part VLMS1500-GS08, "LED RED 0402 SMD", Case Code (Imperial)=0402, Case Code (Metric)=1005, Color=Red, Forward Current=30mA, Forward Voltage=2V, LCSC PART Number=C511370, Manufacturer=Vishay, Max Operating Temperature=85°C, Min Operating Temperature=-30°C, Package Quantity=9000, Power Rating=75mW, Supplier Part Number=78-VLMS1500-GS08, Test Current=20mA, Case/Package=0402, Category=LEDs, ComponentLink1Description=https://datasheet.ciiva.com/13945/vlmo1500-13945367.pdf?src-supplier=Digikey, ComponentLink1URL=https://datasheet.ciiva.com/13945/vlmo1500-13945367.pdf?src-supplier=Digikey, ComponentLink2Description=https://datasheet.ciiva.com/13945/vlmo1500-13945368.pdf?src-supplier=Digikey, ComponentLink2URL=https://datasheet.ciiva.com/13945/vlmo1500-13945368.pdf?src-supplier=Digikey, ComponentLink3Description=https://datasheet.ciiva.com/13945/vlmo1500-13945369.pdf?src-supplier=Digikey, ComponentLink3URL=https://datasheet.ciiva.com/13945/vlmo1500-13945369.pdf?src-supplier=Digikey, Dominant Wavelength=631nm, Height=0.55mm, Illumination Color=Red, Lead Free="Lead Free", Length=1mm, Lens Size=0.5mm, Lens Style=Flat,Rectangular,Square, Luminous Intensity=54mcd, Manufacturer Part Number=VLMS1500-GS08, Mounting Technology="Surface Mount", Number of LEDs=1, Packaging="Tape and Reel", Pins=2, Pricing="1=0.33, 10=0.189, 50=0.189, 100=0.089, 1000=0.076, 10000=0.056 (USD)", Radiation Hardening=No, Reach SVHC Compliant=Unknown, RoHS=Yes, RoHS Compliant=Yes, Series=CHipLED, Stock=5861, Supplier=Mouser, Viewing Angle=130°, Wavelength=631nm, Width=0.5mm
Q1 Q2: library part SS8050-G, "TRANS NPN 25V 1.5A SOT-23-3", Case/Package=TO-236-3, Collector Base Voltage (VCBO)=40V, Collector Emitter Breakdown Voltage=25V, Collector Emitter Saturation Voltage=500mV, Collector-emitter Voltage-Max=400mV, Emitter Base Voltage (VEBO)=5V, LCSC PART Number=C164886, Manufacturer=Comchip, Max Collector Current=1.5A, Max Operating Temperature=150°C, Max Power Dissipation=300mW, Supplier Part Number=641-1790-1-ND, Transition Frequency=100MHz, Category=Transistors, ComponentLink1Description="http://www.comchiptech.com/admin/files/product/SS8050-G RevA181526.pdf?src-supplier=Digikey", ComponentLink1URL="http://www.comchiptech.com/admin/files/product/SS8050-G RevA181526.pdf?src-supplier=Digikey", Height=1.15mm, hFE Min=200, Manufacturer Part Number=SS8050-G, Max Breakdown Voltage=25V, Mounting Technology="Surface Mount", Number of Elements=1, Packaging="Cut Tape", Power Dissipation=300mW, Pricing="1=0.24, 10=0.148, 100=0.0921, 500=0.06754, 1000=0.05958, 3000=0.04941, 6000=0.04428, 9000=0.04166, 15000=0.03872, 21000=0.03697, 30000=0.03527, 75000=0.03155, 150000=0.02924, 300000=0.0275 (USD)", RoHS=Yes, RoHS Compliant=Yes, Series=-, Stock=149582, Supplier=Digikey
Q3: "MOSFET SOT23 N 60V 5OHM 150C", Case/Package=SOT-23, Continuous Drain Current (ID)=115mA, Drain to Source Voltage (Vdss)=60V, Drain-source On Resistance-Max=7.5R, Gate to Source Voltage (Vgs)=20V, Input Capacitance=50pF, LCSC PART Number=C22446827, Manufacturer="ON Semiconductor / Fairchild", Max Operating Temperature=150°C, Max Power Dissipation=200mW, Min Operating Temperature=-55°C, On-State Resistance=5.3R, Package Quantity=1, Threshold Voltage=2.1V, Category=MOSFETs, ComponentLink1Description=https://datasheet.ciiva.com/931/2n7000-931762.pdf?src-supplier=Digikey, ComponentLink1URL=https://datasheet.ciiva.com/931/2n7000-931762.pdf?src-supplier=Digikey, ComponentLink2Description=https://datasheet.ciiva.com/931/2n7000-931764.pdf?src-supplier=Digikey, ComponentLink2URL=https://datasheet.ciiva.com/931/2n7000-931764.pdf?src-supplier=Digikey, ComponentLink3Description=https://datasheet.ciiva.com/1188/660093-1188359.pdf?src-supplier=Element14, ComponentLink3URL=https://datasheet.ciiva.com/1188/660093-1188359.pdf?src-supplier=Element14, ComponentLink4Description=https://datasheet.ciiva.com/1188/660093-1188361.pdf?src-supplier=Element14, ComponentLink4URL=https://datasheet.ciiva.com/1188/660093-1188361.pdf?src-supplier=Element14, ComponentLink5Description=https://datasheet.ciiva.com/22655/660093-22655230.pdf?src-supplier=Element14, ComponentLink5URL=https://datasheet.ciiva.com/22655/660093-22655230.pdf?src-supplier=Element14, ComponentLink6Description=https://datasheet.ciiva.com/1254/660093-1254452.pdf?src-supplier=Newark, ComponentLink6URL=https://datasheet.ciiva.com/1254/660093-1254452.pdf?src-supplier=Newark, ComponentLink7Description=https://datasheet.ciiva.com/17007/2n7002-17007243.pdf?src-supplier=Future+Electronics, ComponentLink7URL=https://datasheet.ciiva.com/17007/2n7002-17007243.pdf?src-supplier=Future+Electronics, Current=115mA, Current Rating=115mA, Dual Supply Voltage=60V, Height=0.93mm, Lead Free="Lead Free", Length=2.92mm, Manufacturer Part Number=2N7002, Mounting Technology="Surface Mount", Nominal Vgs=2.1V, Number of Channels=1, Packaging="Tape and Reel", Pins=3, Pricing="3000=0.104, 9000=0.0951, 24000=0.0698, 45000=0.0675, 99000=0.0359 (USD)", Rds On Max=7.5R, Reach SVHC Compliant=No, RoHS=Yes, RoHS Compliant=Yes, Series=-, Stock=3060000, Supplier="Arrow Electronics", Supplier Part Number=2N7002, Turn-Off Delay Time=20ns, Turn-On Delay Time=20ns, Voltage=60V, Voltage Rating (DC)=60V, Width=1.3mm
R1 R2 R3 R6 R16 R18 R21 R22 R23 R24 R35 R36: library part RC0402JR-070RL, "RES 0 OHM JUMPER 1/16W 0402", Case Code (Imperial)=0402, Case Code (Metric)=1005, LCSC PART Number=C60485, Manufacturer=Yageo, Max Operating Temperature=155°C, Max Power Dissipation=63mW, Min Operating Temperature=-55°C, Package Quantity=1, Power Rating=62.5mW, Resistance Tolerance=5%, Resistor Type="Thick Film", Supplier Part Number=311-0.0JRCT-ND, Temperature Coefficient=200ppm/°C, Voltage Rating=50V, Case/Package=0402, Category="Chip SMD Resistors", ComponentLink1Description=https://datasheet.ciiva.com/2452/pyu-rc0402-51-rohs-l-6-2452608.pdf?src-supplier=Digikey, ComponentLink1URL=https://datasheet.ciiva.com/2452/pyu-rc0402-51-rohs-l-6-2452608.pdf?src-supplier=Digikey, ComponentLink2Description=https://datasheet.ciiva.com/11808/0900766b80c66297-11808195.pdf?src-supplier=Rs, ComponentLink2URL=https://datasheet.ciiva.com/11808/0900766b80c66297-11808195.pdf?src-supplier=Rs, ComponentLink3Description=https://datasheet.ciiva.com/2452/pyu-r-int-thick-7-2452609.pdf?src-supplier=Digikey, ComponentLink3URL=https://datasheet.ciiva.com/2452/pyu-r-int-thick-7-2452609.pdf?src-supplier=Digikey, ComponentLink4Description=https://datasheet.ciiva.com/2452/pyu-r-int-thick-7-2452610.pdf?src-supplier=Digikey, ComponentLink4URL=https://datasheet.ciiva.com/2452/pyu-r-int-thick-7-2452610.pdf?src-supplier=Digikey, ComponentLink5Description=https://datasheet.ciiva.com/8896/pyu-rc0402-51-rohs-l-6-8896201.pdf?src-supplier=Avnet, ComponentLink5URL=https://datasheet.ciiva.com/8896/pyu-rc0402-51-rohs-l-6-8896201.pdf?src-supplier=Avnet, ComponentLink6Description=https://datasheet.ciiva.com/15189/getdatasheetpartid-326379-15189533.pdf?src-supplier=Verical, ComponentLink6URL=https://datasheet.ciiva.com/15189/getdatasheetpartid-326379-15189533.pdf?src-supplier=Verical, ComponentLink7Description=https://datasheet.ciiva.com/7983/1018594-7983535.pdf?src-supplier=Element14, ComponentLink7URL=https://datasheet.ciiva.com/7983/1018594-7983535.pdf?src-supplier=Element14, ComponentLink8Description=https://datasheet.ciiva.com/22747/1018594-22747515.pdf?src-supplier=Element14, ComponentLink8URL=https://datasheet.ciiva.com/22747/1018594-22747515.pdf?src-supplier=Element14, Construction=Rectangular, Contact Plating=Tin,Matte, Depth=0.5mm, Features="Moisture Resistant", Height=0.016inch, Lead Free="Lead Free", Length=1mm, Manufacturer Part Number=RC0402JR-070RL, Military Standard=Not, Number of Terminations=2, Packaging="Tape and Reel", Pricing="1=0.1, 10=0.01, 25=0.0064, 50=0.0054, 100=0.0047, 250=0.00392, 500=0.00346, 1000=0.00304, 5000=0.0023, 10000=0.00206, 20000=0.00185, 30000=0.00175, 50000=0.00163, 70000=0.00155, 100000=0.00148, 250000=0.00133, 500000=0.00123, 1000000=0.00115 (USD)", Reach SVHC Compliant=Unknown, RoHS=Yes, RoHS Compliant=Yes, Series=RC, Stock=10747354, Supplier=Digikey, Technology="THICK FILM", Termination=SMD/SMT, Tolerance=5%, Width=0.02inch
R4 R5 R17 R19: library part RC0402FR-0727RL, "RES 27 OHM 1% 1/16W 0402", Case Code (Imperial)=0402, Case Code (Metric)=1005, LCSC PART Number=C138021, Manufacturer=Yageo, Max Operating Temperature=155°C, Max Power Dissipation=63mW, Min Operating Temperature=-55°C, Power Rating=62.5mW, Resistance Tolerance=1%, Resistor Type="Thick Film", Supplier Part Number=2577120, Temperature Coefficient=100ppm/°C, Voltage Rating=50V, Case/Package=0402, Category="Chip SMD Resistors", ComponentLink1Description=https://datasheet.ciiva.com/11808/0900766b80c66297-11808450.pdf?src-supplier=Rs, ComponentLink1URL=https://datasheet.ciiva.com/11808/0900766b80c66297-11808450.pdf?src-supplier=Rs, ComponentLink2Description=https://datasheet.ciiva.com/17044/pyu-rc0402-51-rohs-l-6-17044345.pdf?src-supplier=Future+Electronics, ComponentLink2URL=https://datasheet.ciiva.com/17044/pyu-rc0402-51-rohs-l-6-17044345.pdf?src-supplier=Future+Electronics, ComponentLink3Description=https://datasheet.ciiva.com/15189/getdatasheetpartid-327852-15189402.pdf?src-supplier=Verical, ComponentLink3URL=https://datasheet.ciiva.com/15189/getdatasheetpartid-327852-15189402.pdf?src-supplier=Verical, ComponentLink4Description=https://datasheet.ciiva.com/7849/1018594-7849926.pdf?src-supplier=Element14, ComponentLink4URL=https://datasheet.ciiva.com/7849/1018594-7849926.pdf?src-supplier=Element14, ComponentLink5Description=https://datasheet.ciiva.com/7849/1018594-7849927.pdf?src-supplier=Element14, ComponentLink5URL=https://datasheet.ciiva.com/7849/1018594-7849927.pdf?src-supplier=Element14, Construction=Rectangular, Depth=0.5mm, Features="Moisture Resistant", Height=0.016inch, Lead Free="Lead Free", Length=1mm, Manufacturer Part Number=RC0402FR-0727RL, Military Standard=Not, Number of Terminations=2, Packaging="Tape and Reel", Pricing="10000=0.0007, 50000=0.0007, 200000=0.0007, 500000=0.0007, 1250000=0.0006 (USD)", Reach SVHC Compliant=Unknown, RoHS=Yes, RoHS Compliant=Yes, Series=RC, Stock=2130000, Supplier="Future Electronics", Technology="THICK FILM", Termination=SMD/SMT, Tolerance=1%, Voltage Rating (AC)=50V, Weight=2.3E-05oz, Width=0.5mm
R7 R11 R14 R15 R20 R30 R31: library part AC0402FR-0710KL, "AC0402FR-0710KL", Case Code (Imperial)=0402, Case Code (Metric)=1005, LCSC PART Number=C144807, Manufacturer=Yageo, Max Operating Temperature=155°C, Max Power Dissipation=63mW, Min Operating Temperature=-55°C, Power Rating=62.5mW, Supplier Part Number=2025338, Temperature Coefficient=100ppm/°C, Tolerance=1%, Voltage Rating=50V, Case/Package=0402, Category="Chip SMD Resistors", ComponentLink1Description=https://datasheet.ciiva.com/12656/pyu-ac-51-rohs-l-2-12656634.pdf?src-supplier=Mouser, ComponentLink1URL=https://datasheet.ciiva.com/12656/pyu-ac-51-rohs-l-2-12656634.pdf?src-supplier=Mouser, Features="Moisture Resistant,Automotive AEC-Q200", Height=0.015inch, Lead Free="Lead Free", Length=0.039inch, Manufacturer Part Number=AC0402FR-0710KL, Number of Terminations=2, Packaging="Tape and Reel", Pricing="10000=0.0011, 40000=0.0011, 150000=0.001, 400000=0.001, 1000000=0.001 (USD)", RoHS=Yes, RoHS Compliant=Yes, Series=AC, Stock=16805000, Supplier="Future Electronics", Termination=SMD/SMT, Width=0.02inch
R8 R9 R12 R13: library part AC0402FR-075K1L, "RES SMD 5.1K OHM 1% 1/16W 0402", Case Code (Imperial)=0402, Case Code (Metric)=1005, LCSC PART Number=C144745, Manufacturer=Yageo, Max Operating Temperature=155°C, Max Power Dissipation=63mW, Min Operating Temperature=-55°C, Supplier Part Number=YAG3503CT-ND, Temperature Coefficient=100ppm/°C, Tolerance=1%, Voltage Rating=50V, Case/Package=0402, Category="Chip SMD Resistors", ComponentLink1Description=http://www.yageo.com/NewPortal/yageodocoutput?fileName=/pdf/R-Chip/PYu-AC_51_RoHS_L_6.pdf&src-supplier=Digikey, ComponentLink1URL=http://www.yageo.com/NewPortal/yageodocoutput?fileName=/pdf/R-Chip/PYu-AC_51_RoHS_L_6.pdf&src-supplier=Digikey, ComponentLink2Description=http://www.yageo.com/documents/recent/PYu-AC_51_RoHS_L_2_revised.pdf?src-supplier=Future+Electronics, ComponentLink2URL=http://www.yageo.com/documents/recent/PYu-AC_51_RoHS_L_2_revised.pdf?src-supplier=Future+Electronics, ComponentLink3Description=https://datasheet.octopart.com/AC0402FR-075K1L-Yageo-datasheet-166720450.pdf?src-supplier=Future+Electronics, ComponentLink3URL=https://datasheet.octopart.com/AC0402FR-075K1L-Yageo-datasheet-166720450.pdf?src-supplier=Future+Electronics, Features="Moisture Resistant,Automotive AEC-Q200", Height=0.015inch, Lead Free="Lead Free", Length=0.039inch, Manufacturer Part Number=AC0402FR-075K1L, Mounting Technology="Surface Mount", Number of Terminations=2, Packaging="Cut Tape", Power Rating=63mW, Pricing="1=0.1, 10=0.009, 100=0.0071, 1000=0.00612, 2500=0.0051, 5000=0.00407, 10000=0.00204 (USD)", RoHS=Yes, RoHS Compliant=Yes, Series=AC, Stock=32155, Supplier=Digikey, Width=0.02inch